# EAGLE board Final Schematic (EAGLE 6.5.0)
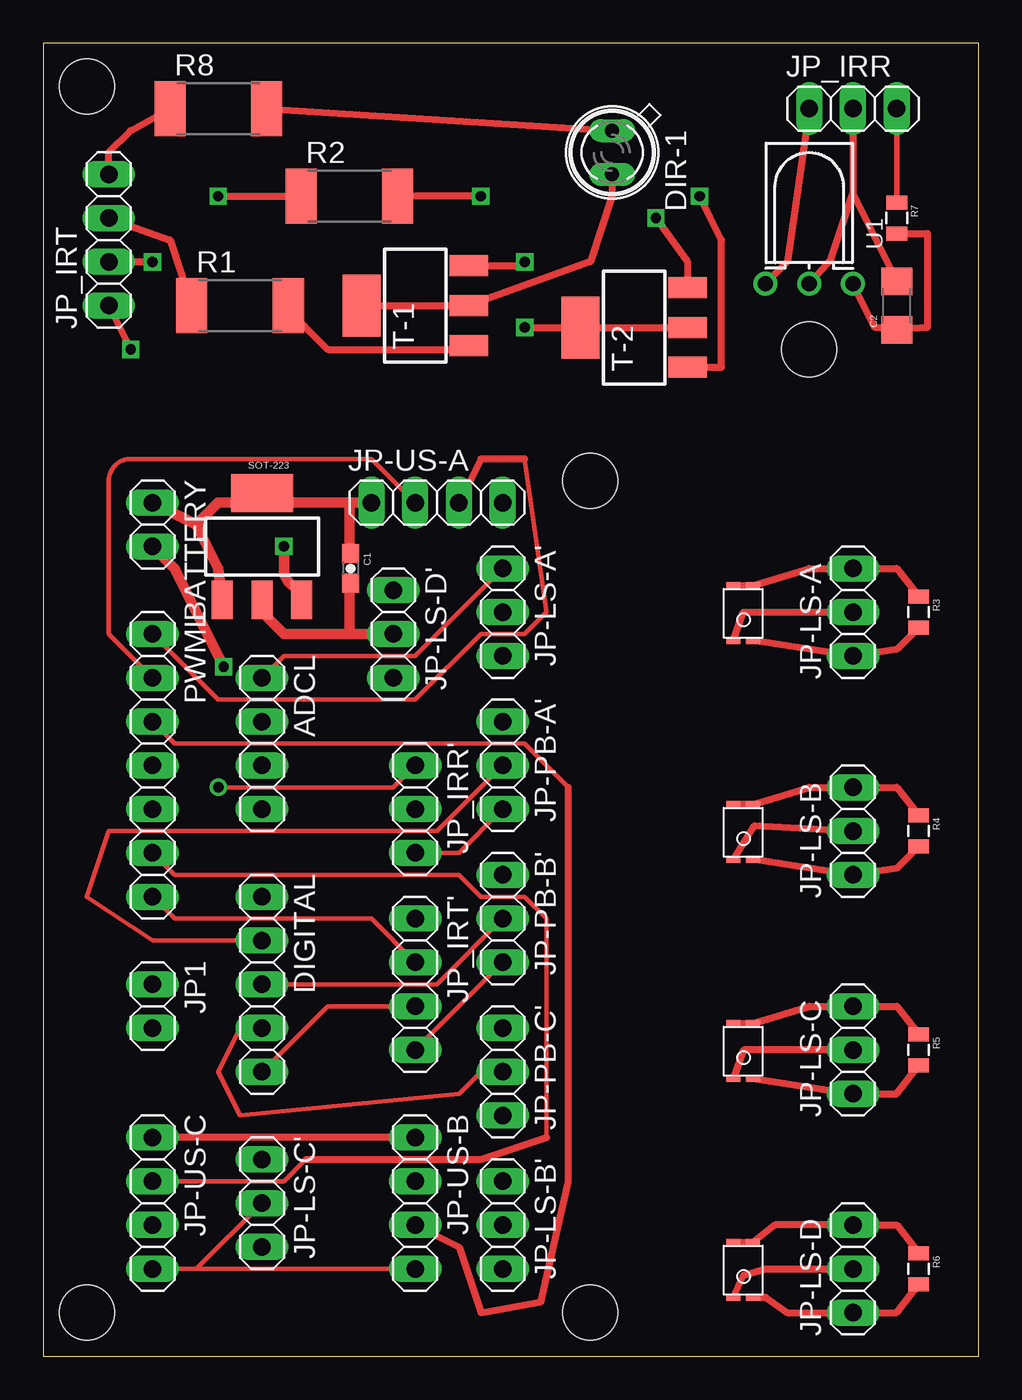
[diagram p0: board, top side]
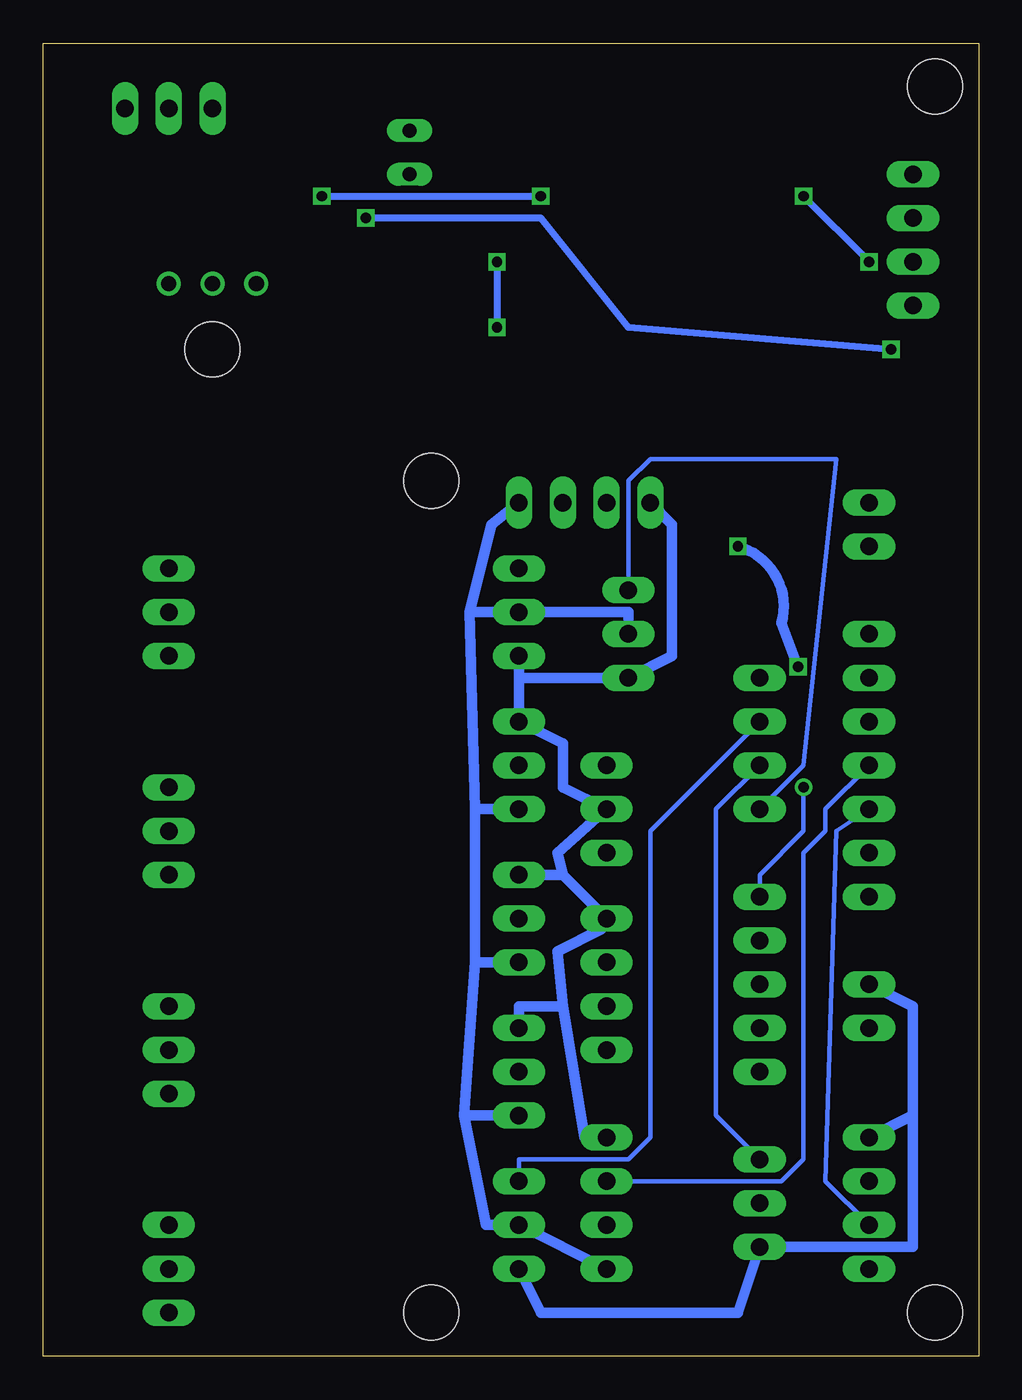
[diagram p1: board, bottom side, seen from below]

Size 54.28 x 76.19 mm. Coordinates in mm from the lower left corner, seen from the top.
Outline: 0,0 54.28,0 54.28,76.19 0,76.19 0,0
Copper layers (1*16): Top 0.035mm / dielectric 1.5mm / Bottom 0.035mm
Design rules "default *": minimum track width 0.001525mm, minimum drill 24mil, track to track 8mil, track to pad 8mil, pad to pad 8mil, via to via 8mil, smd to smd 8mil, copper to edge 40mil, drill to drill 8mil, minimum pad ring 10mil, minimum via ring 8mil, stop-mask expansion 4mil, vias tented up to drill 0mil, thermal gap 10mil
Net classes: 0 default: width 0.483 mm
Holes 3.17 mm at 31.75,50.8 31.75,2.54 44.45,58.42 2.54,73.66 2.54,2.54

## Footprints (pad centres in the part's own frame; a part is rotated, then mirrored left to right if it is on the bottom)
1X04 = drill 1.016 long: 1 -3.81,0; 2 -1.27,0; 3 1.27,0; 4 3.81,0
1X02 = drill 1.016 long: 1 -1.27,0; 2 1.27,0
0603-CAP = smd 1.1 x 1: 1 -0.85,0; 2 0.85,0
1206 = smd 1.6 x 1.8: 1 -1.4,0; 2 1.4,0
1X05 = drill 1.016 long: 1 -5.08,0; 2 -2.54,0; 3 0,0; 4 2.54,0; 5 5.08,0
SFH482 = drill 0.813 long: A -1.27,0; K 1.27,0
1X03 = drill 1.016 long: 1 -2.54,0; 2 0,0; 3 2.54,0
1X07 = drill 1.016 long: 1 -7.62,0; 2 -5.08,0; 3 -2.54,0; 4 0,0; 5 2.54,0; 6 5.08,0; 7 7.62,0
R2512 = smd 1.8 x 3.2: 1 -2.8,0; 2 2.8,0
0805 = smd 0.8 x 1.2: 1 -0.9,0; 2 0.9,0
DIODE = smd 0.813 x 0.406: GND1 -0.6,1.55; GND2 0.55,1.55; IO 0.55,-1.65; VCC -0.6,-1.65
SOT223 = smd 1.219 x 2.235: GND1 0,-3.099; IN -2.311,-3.099; OUT 2.311,-3.099 | smd 3.6 x 2.2: GND2 0,3.099
SOT223' = smd 1.219 x 2.235: 1 -2.311,-3.099; 2 0,-3.099; 3 2.311,-3.099 | smd 3.6 x 2.2: 4 0,3.099
TSOP382 = drill 0.889: 1 -2.54,0; 2 0,0; 3 2.54,0

## Placement (x,y rotation side)
ADCL  [1X04]  12.7,35.56 270 top
BATTERY  [1X02]  6.35,48.26 270 top
C1  3.3uF  [0603-CAP]  17.84,45.72 270 top
C2  100uF  [1206]  49.53,60.96 90 top
DIGITAL  [1X05]  12.7,21.59 270 top
DIR-1  SFH482  [SFH482]  33.02,69.85 270 top
JP1  [1X02]  6.35,20.32 270 top
JP-LS-A  [1X03]  46.99,43.18 90 top
JP-LS-A'  [1X03]  26.67,43.18 270 top
JP-LS-B  [1X03]  46.99,30.48 90 top
JP-LS-B'  [1X03]  26.67,7.62 270 top
JP-LS-C  [1X03]  46.99,17.78 90 top
JP-LS-C'  [1X03]  12.7,8.89 270 top
JP-LS-D  [1X03]  46.99,5.08 90 top
JP-LS-D'  [1X03]  20.32,41.91 270 top
JP-PB-A'  [1X03]  26.67,34.29 270 top
JP-PB-B'  [1X03]  26.67,25.4 270 top
JP-PB-C'  [1X03]  26.67,16.51 270 top
JP-US-A  [1X04]  22.86,49.53 0 top
JP-US-B  [1X04]  21.59,8.89 270 top
JP-US-C  [1X04]  6.35,8.89 270 top
JP_IRR  [1X03]  46.99,72.39 0 top
JP_IRR'  [1X03]  21.59,31.75 270 top
JP_IRT  [1X04]  3.81,64.77 90 top
JP_IRT'  [1X04]  21.59,21.59 270 top
PWML  [1X07]  6.35,34.29 270 top
R1  422  [R2512]  11.43,60.96 0 top
R2  422  [R2512]  17.78,67.31 0 top
R3  100k  [0805]  50.8,43.18 270 top
R4  100k  [0805]  50.8,30.48 270 top
R5  100k  [0805]  50.8,17.78 270 top
R6  100k  [0805]  50.8,5.08 270 top
R7  100  [0805]  49.53,66.04 270 top
R8  26.1  [R2512]  10.16,72.39 0 top
SFH-5711-A  SFH5711  [DIODE]  40.64,43.18 0 top
SFH-5711-B  SFH5711  [DIODE]  40.64,30.48 0 top
SFH-5711-C  SFH5711  [DIODE]  40.64,17.78 0 top
SFH-5711-D  SFH5711  [DIODE]  40.64,5.08 0 top
SOT-223  [SOT223]  12.7,46.99 0 top
T-1  PZT2222A  [SOT223']  21.59,60.96 90 top
T-2  PZT2222A  [SOT223']  34.29,59.69 90 top
U1  [TSOP382]  44.45,62.23 0 top

## Library data of the parts
ADCL BATTERY DIGITAL JP1 JP-LS-A JP-LS-A' JP-LS-B JP-LS-B' JP-LS-C JP-LS-C' JP-LS-D JP-LS-D' JP-PB-A' JP-PB-B' JP-PB-C' JP-US-A JP-US-B JP-US-C JP_IRR JP_IRR' JP_IRT JP_IRT' PWML = pinhead
C1 C2 R1-R8 T-1 T-2 U1 = beacon_board
DIR-1 = led
SFH-5711-A SFH-5711-B SFH-5711-C SFH-5711-D SOT-223 = JDT-18

## Nets
5V: JP-LS-A'.2 JP-LS-B'.2 JP-LS-C'.2 JP-LS-D'.2 JP-PB-A'.3 JP-PB-B'.3 JP-PB-C'.3 JP-US-A.4 JP-US-B.4 JP-US-C.4 JP_IRR'.3 JP_IRT'.4 SOT-223.GND1
9V-BAT: BATTERY.2 SOT-223.OUT
GND: BATTERY.1 JP1.1 JP-LS-A'.3 JP-LS-B'.3 JP-LS-C'.3 JP-LS-D'.3 JP-PB-A'.1 JP-PB-B'.1 JP-PB-C'.1 JP-US-A.1 JP-US-B.1 JP-US-C.1 JP_IRR'.2 JP_IRT'.1 SOT-223.GND2 SOT-223.IN
GND-IR-R: C2.2 JP_IRR.2 U1.2
GND-IR-T: JP_IRT.1 T-2.3
GND-LS-A: JP-LS-A.3 R3.1 SFH-5711-A.GND1 SFH-5711-A.GND2
GND-LS-B: JP-LS-B.3 R4.1 SFH-5711-B.GND1 SFH-5711-B.GND2
GND-LS-C: JP-LS-C.3 R5.1 SFH-5711-C.GND1 SFH-5711-C.GND2
GND-LS-D: JP-LS-D.3 R6.1 SFH-5711-D.GND1 SFH-5711-D.GND2
IO-LS-A: JP-LS-A.1 R3.2 SFH-5711-A.IO
IO-LS-B: JP-LS-B.1 R4.2 SFH-5711-B.IO
IO-LS-C: JP-LS-C.1 R5.2 SFH-5711-C.IO
IO-LS-D: JP-LS-D.1 R6.2 SFH-5711-D.IO
IR_CC: DIGITAL.5 JP_IRT'.3
N$1: DIR-1.A R8.2
N$2: DIR-1.K T-1.2 T-1.4
N$4: R2.2 T-2.1
N$5: R1.2 T-1.1
N$6: T-1.3 T-2.2 T-2.4
N$7: JP_IRT'.2 PWML.7
PC0: DIGITAL.1 JP_IRR'.1
PC1: DIGITAL.2 JP-PB-A'.2
PC2: DIGITAL.3 JP-PB-B'.2
PC3: DIGITAL.4 JP-PB-C'.2
PE0: JP-US-A.3 PWML.1
PE1: JP-US-A.2 PWML.2
PE3: JP-US-C.2 PWML.6
PE4: JP-US-B.3 PWML.3
PE5: JP-US-B.2 PWML.4
PF0: ADCL.1 JP-LS-A'.1
PF1: ADCL.2 JP-LS-B'.1
PF2: ADCL.3 JP-LS-C'.1
PF3: ADCL.4 JP-LS-D'.1
PG5: JP-US-C.3 PWML.5
VCC-IR-R: JP_IRR.3 R7.1
VCC-IR-T: JP_IRT.4 R8.1
VCC-LS-A: JP-LS-A.2 SFH-5711-A.VCC
VCC-LS-B: JP-LS-B.2 SFH-5711-B.VCC
VCC-LS-C: JP-LS-C.2 SFH-5711-C.VCC
VCC-LS-D: JP-LS-D.2 SFH-5711-D.VCC
VIN-IR-1: JP_IRT.3 R1.1
VIN-IR-2: JP_IRT.2 R2.1
VOUT-IR-R: JP_IRR.1 U1.1
VS-IR-R: C2.1 R7.2 U1.3

## Tracks (layer width: path | path; a pad name or v marks a point on that pad's centre or on a via)
5V
  Top 0.254: 8.89,5.08 JP-LS-C'.2 | JP-US-C.4 8.89,5.08 | 8.89,5.08 JP-US-B.4 | JP-PB-B'.3 JP_IRT'.4 | JP_IRR'.3 24.13,29.21 JP-PB-A'.3
  Top 0.61: JP-LS-D'.2 17.78,41.91 | 17.78,41.91 17.78,44.45 | 17.78,41.91 13.97,41.91 12.7,43.18 SOT-223.GND1
  Bottom 0.61: JP-LS-D'.2 20.32,43.18 JP-LS-A'.2 29.53,43.18 | JP-US-A.4 28.26,48.26 29.53,43.18 | 29.53,43.18 29.21,31.75 | 29.21,31.75 JP-PB-A'.3 | 29.21,22.86 29.84,13.97 | JP-PB-B'.3 29.21,22.86 | 29.21,22.86 29.21,31.75 | JP-PB-C'.3 29.84,13.97 | 29.84,13.97 28.57,7.62 JP-LS-B'.2 JP-US-B.4
9V-BAT  (via drill 0.6)
  Top 0.61: v10.48,40.01 7.62,45.72 BATTERY.2 | v13.97,46.99 13.97,45.72 arc90 15.24,44.45 15.01,44.45 SOT-223.OUT
  Bottom 0.61: v13.97,46.99 arc90 11.43,42.55 v10.48,40.01
GND
  Top 0.406: JP-US-B.1 JP-US-C.1
  Top 0.61: 8.89,48.26 10.16,45.72 SOT-223.IN | 8.89,48.26 10.16,49.53 12.7,49.53 | 8.89,48.26 BATTERY.1 | SOT-223.GND2 12.7,49.53 | 12.7,49.53 17.78,49.53 | 17.78,46.99 17.78,49.53 | 17.78,49.53 JP-US-A.1 19.05,50.09
  Bottom 0.61: JP-US-A.1 17.78,48.26 17.78,40.64 JP-LS-D'.3 26.67,39.37 | 26.67,39.37 JP-LS-A'.3 | 26.67,39.37 JP-PB-A'.1 24.13,35.56 24.13,33.02 JP_IRR'.2 24.45,29.21 24.13,27.94 | 24.13,27.94 JP-PB-B'.1 | 24.13,27.94 JP_IRT'.1 21.91,24.77 24.45,23.5 24.13,20.32 | 24.13,20.32 22.86,12.7 JP-US-B.1 | JP-PB-C'.1 26.67,20.32 24.13,20.32 | JP-US-C.1 3.81,13.97 | JP1.1 3.81,20.32 3.81,13.97 | 3.81,13.97 3.81,6.35 JP-LS-C'.3 13.97,2.54 25.4,2.54 JP-LS-B'.3
GND-IR-R
  Top 0.406: U1.2 45.72,63.63 46.99,67.44 | JP_IRR.2 46.99,67.44 | 46.99,67.44 C2.2
GND-IR-T  (via drill 0.6)
  Top 0.406: JP_IRT.1 v5.08,58.42 | v35.56,66.04 37.39,63.5 T-2.3
  Bottom 0.406: v5.08,58.42 20.32,59.69 25.4,66.04 v35.56,66.04
GND-LS-A
  Top 0.406: SFH-5711-A.GND1 SFH-5711-A.GND2 44.45,45.72 JP-LS-A.3 49.53,45.72 R3.1
GND-LS-B
  Top 0.406: SFH-5711-B.GND1 SFH-5711-B.GND2 44.45,33.02 JP-LS-B.3 49.53,33.02 R4.1
GND-LS-C
  Top 0.406: SFH-5711-C.GND1 SFH-5711-C.GND2 44.45,20.32 JP-LS-C.3 49.53,20.32 R5.1
GND-LS-D
  Top 0.406: SFH-5711-D.GND1 SFH-5711-D.GND2 42.46,7.62 JP-LS-D.3 49.53,7.62 R6.1
IO-LS-A
  Top 0.406: R3.2 49.53,41.01 JP-LS-A.1 SFH-5711-A.IO
IO-LS-B
  Top 0.406: R4.2 49.53,28.31 JP-LS-B.1 SFH-5711-B.IO
IO-LS-C
  Top 0.406: SFH-5711-C.IO JP-LS-C.1 49.53,15.24 R5.2
IO-LS-D
  Top 0.406: R6.2 49.53,2.54 JP-LS-D.1 43.18,2.54 41.91,3.43 SFH-5711-D.IO
IR_CC
  Top 0.254: DIGITAL.5 16.51,20.32 JP_IRT'.3
N$1
  Top 0.406: R8.2 DIR-1.A
N$2
  Top 0.406: DIR-1.K 33.02,67.31 31.75,63.5 T-1.2 T-1.4
N$4  (via drill 0.6)
  Top 0.406: v25.4,67.31 R2.2 | v38.1,67.31 39.37,64.77 39.37,57.38 T-2.1
  Bottom 0.406: v38.1,67.31 v25.4,67.31
N$5
  Top 0.406: R1.2 13.97,60.96 16.51,58.42 24.69,58.42 T-1.1
N$6  (via drill 0.6)
  Top 0.406: T-1.3 27.94,63.27 v27.94,63.5 | v27.94,59.69 T-2.4 T-2.2
  Bottom 0.406: v27.94,63.5 v27.94,59.69
N$7
  Top 0.254: PWML.7 7.62,25.4 19.05,25.4 JP_IRT'.2
PC0  (via drill 0.61)
  Top 0.254: JP_IRR'.1 20.32,33.02 v10.16,33.02
  Bottom 0.254: v10.16,33.02 10.16,30.48 12.7,27.94 DIGITAL.1
PC1
  Top 0.254: DIGITAL.2 6.35,24.13 2.54,26.67 3.81,30.48 22.86,30.48 JP-PB-A'.2
PC2
  Top 0.254: DIGITAL.3 22.86,21.59 JP-PB-B'.2
PC3
  Top 0.254: DIGITAL.4 11.43,19.05 10.16,16.51 11.43,13.97 24.13,15.24 25.4,16.51 JP-PB-C'.2
PE0
  Top 0.254: PWML.1 10.16,38.1 21.59,38.1 25.4,41.91 27.94,41.91 29.21,43.18 27.94,52.07
  Top 0.406: 27.94,52.07 25.4,52.07 JP-US-A.3
PE1
  Top 0.254: PWML.2 3.81,41.91 3.81,50.8 arc-90 5.08,52.07 19.05,52.07 JP-US-A.2
PE3
  Top 0.254: PWML.6 7.62,27.94 24.13,27.94 25.4,26.67 27.94,26.67 29.21,25.4 29.21,12.7 | 15.24,11.43 13.97,10.16 JP-US-C.2
  Top 0.406: 15.24,11.43 25.4,11.43 29.21,12.7
  Bottom 0.254: JP-US-C.2 7.62,10.16
PE4
  Top 0.254: PWML.3 7.62,35.56 27.94,35.56 30.48,33.02
  Top 0.406: JP-US-B.3 24.13,6.35 25.4,2.54 28.89,3.17 30.48,10.16 30.48,33.02
PE5
  Bottom 0.254: PWML.4 8.89,31.75 8.89,30.48 10.16,29.21 10.16,11.43 11.43,10.16 JP-US-B.2
PF0
  Top 0.254: ADCL.1 13.97,40.64 21.59,40.64 JP-LS-A'.1
PF1
  Bottom 0.254: ADCL.2 19.05,30.48 19.05,12.7 20.32,11.43 26.67,11.43 JP-LS-B'.1
PF2
  Bottom 0.254: ADCL.3 15.24,31.75 15.24,13.97 JP-LS-C'.1
PF3
  Bottom 0.254: JP-LS-D'.1 20.32,50.8 19.05,52.07 8.26,52.07 10.16,34.29 ADCL.4
PG5
  Bottom 0.254: PWML.5 8.26,30.48 8.89,10.16 JP-US-C.3
VCC-IR-R
  Top 0.305: JP_IRR.3 R7.1
VCC-IR-T
  Top 0.406: R8.1 5.08,71.12 3.81,69.85 JP_IRT.4
VCC-LS-A
  Top 0.406: SFH-5711-A.VCC 40.64,43.18 JP-LS-A.2
VCC-LS-B
  Top 0.406: SFH-5711-B.VCC 41.27,30.8 JP-LS-B.2
VCC-LS-C
  Top 0.406: JP-LS-C.2 40.64,17.78 SFH-5711-C.VCC
VCC-LS-D
  Top 0.406: SFH-5711-D.VCC 40.64,4.7 41.91,5.08 JP-LS-D.2
VIN-IR-1
  Top 0.406: JP_IRT.3 7.36,64.77 R1.1
VIN-IR-2  (via drill 0.6)
  Top 0.406: JP_IRT.2 v6.35,63.5 | v10.16,67.31 R2.1
  Bottom 0.406: v6.35,63.5 v10.16,67.31
VOUT-IR-R
  Top 0.406: JP_IRR.1 43.18,63.5 U1.1
VS-IR-R
  Top 0.406: U1.3 48.26,59.69 C2.1 51.31,59.69 51.31,65.14 R7.2